# EAGLE board 5MMTetraStellaBreakout (EAGLE 6.5.0)
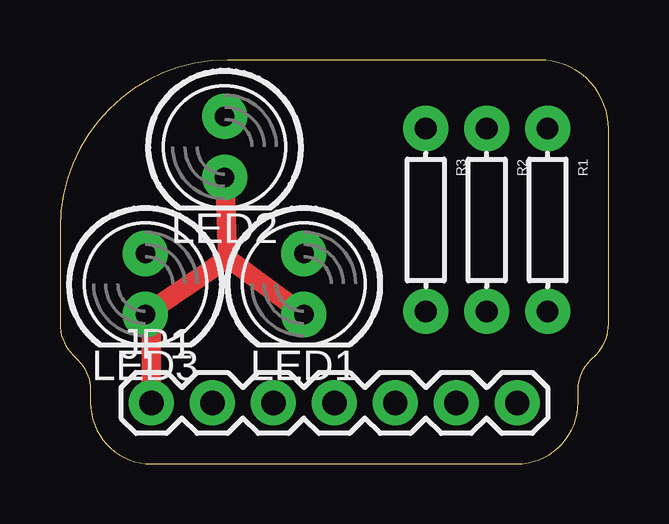
[diagram p0: board, top side]
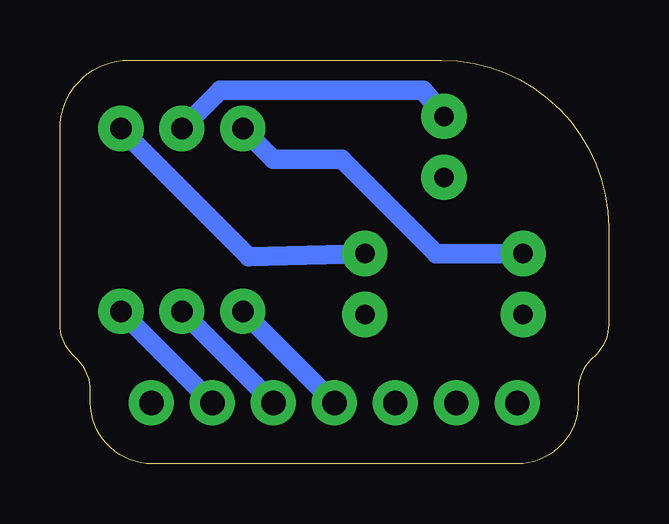
[diagram p1: board, bottom side, seen from below]

Size 22.86 x 16.83 mm. Coordinates in mm from the lower left corner, seen from the top.
Outline: 21.59,2.56 21.59,3.07 arc-45 22.12,4.34 22.33,4.55 arc45 22.86,5.82 22.86,13.95 arc90 19.98,16.83 6.98,16.82 arc90 0,9.84 0,5.82 arc45 0.53,4.55 0.74,4.34 arc-45 1.27,3.07 1.27,2.54 arc90 3.81,0 19.03,0 arc90 21.59,2.56
Copper layers (1*16): Top 0.035mm / dielectric 1.5mm / Bottom 0.035mm
Design rules "default": minimum track width 10mil, minimum drill 24mil, track to track 8mil, track to pad 8mil, pad to pad 8mil, via to via 8mil, smd to smd 8mil, copper to edge 40mil, drill to drill 8mil, minimum pad ring 10mil, minimum via ring 8mil, stop-mask expansion 4mil, vias tented up to drill 0mil, thermal gap 10mil

## Footprints (pad centres in the part's own frame; a part is rotated, then mirrored left to right if it is on the bottom)
1X07 = drill 1.016 pad 1.88: 1 0,0; 2 2.54,0; 3 5.08,0; 4 7.62,0; 5 10.16,0; 6 12.7,0; 7 15.24,0
LED5MM = drill 0.813 pad 1.88: A -1.27,0; K 1.27,0
AXIAL-0.3 = drill 0.9 pad 1.88: P$1 -3.81,0; P$2 3.81,0

## Placement (x,y rotation side)
JP1  [1X07]  3.81,2.54 0 top
LED1  [LED5MM]  10.16,7.49 270 top
LED2  [LED5MM]  6.86,13.21 270 top
LED3  [LED5MM]  3.56,7.49 270 top
R1  [AXIAL-0.3]  20.32,10.16 270 top
R2  [AXIAL-0.3]  17.78,10.16 270 top
R3  [AXIAL-0.3]  15.24,10.16 270 top

## Library data of the parts
JP1 = SparkFun-Connectors
LED1-LED3 R1-R3 = barbary_enterprises

## Nets
D8: JP1.7
D9: JP1.6 R1.P$2
D10: JP1.5 R2.P$2
D11: JP1.4 R3.P$2
D12: JP1.3
D13: JP1.2
GND: JP1.1 LED1.K LED2.K LED3.K
N$1: LED1.A R1.P$1
N$3: LED2.A R2.P$1
N$5: LED3.A R3.P$1

## Tracks (layer width: path | path; a pad name or v marks a point on that pad's centre or on a via)
D9
  Bottom 0.813: JP1.6 R1.P$2
D10
  Bottom 0.813: JP1.5 R2.P$2
D11
  Bottom 0.813: JP1.4 R3.P$2
GND
  Top 0.813: JP1.1 3.81,5.97 LED3.K 6.99,8.57 | 6.99,8.57 LED1.K | LED2.K 6.99,8.57
N$1
  Bottom 0.813: R1.P$1 14.99,8.64 LED1.A
N$3
  Bottom 0.813: R2.P$1 16.19,15.56 7.73,15.56 LED2.A
N$5
  Bottom 0.813: LED3.A 7.18,8.76 11.11,12.7 13.97,12.7 R3.P$1